# Altium PCB QCLogic Rev B.PcbDoc
Units mm, origin at the board's own origin, x right, y up, seen from the top; angles counter-clockwise.
Board outline 60 x 60 mm, 2 copper layers (Top Layer, Bottom Layer); 2 components, 0 nets, 311 pads, 0 vias.
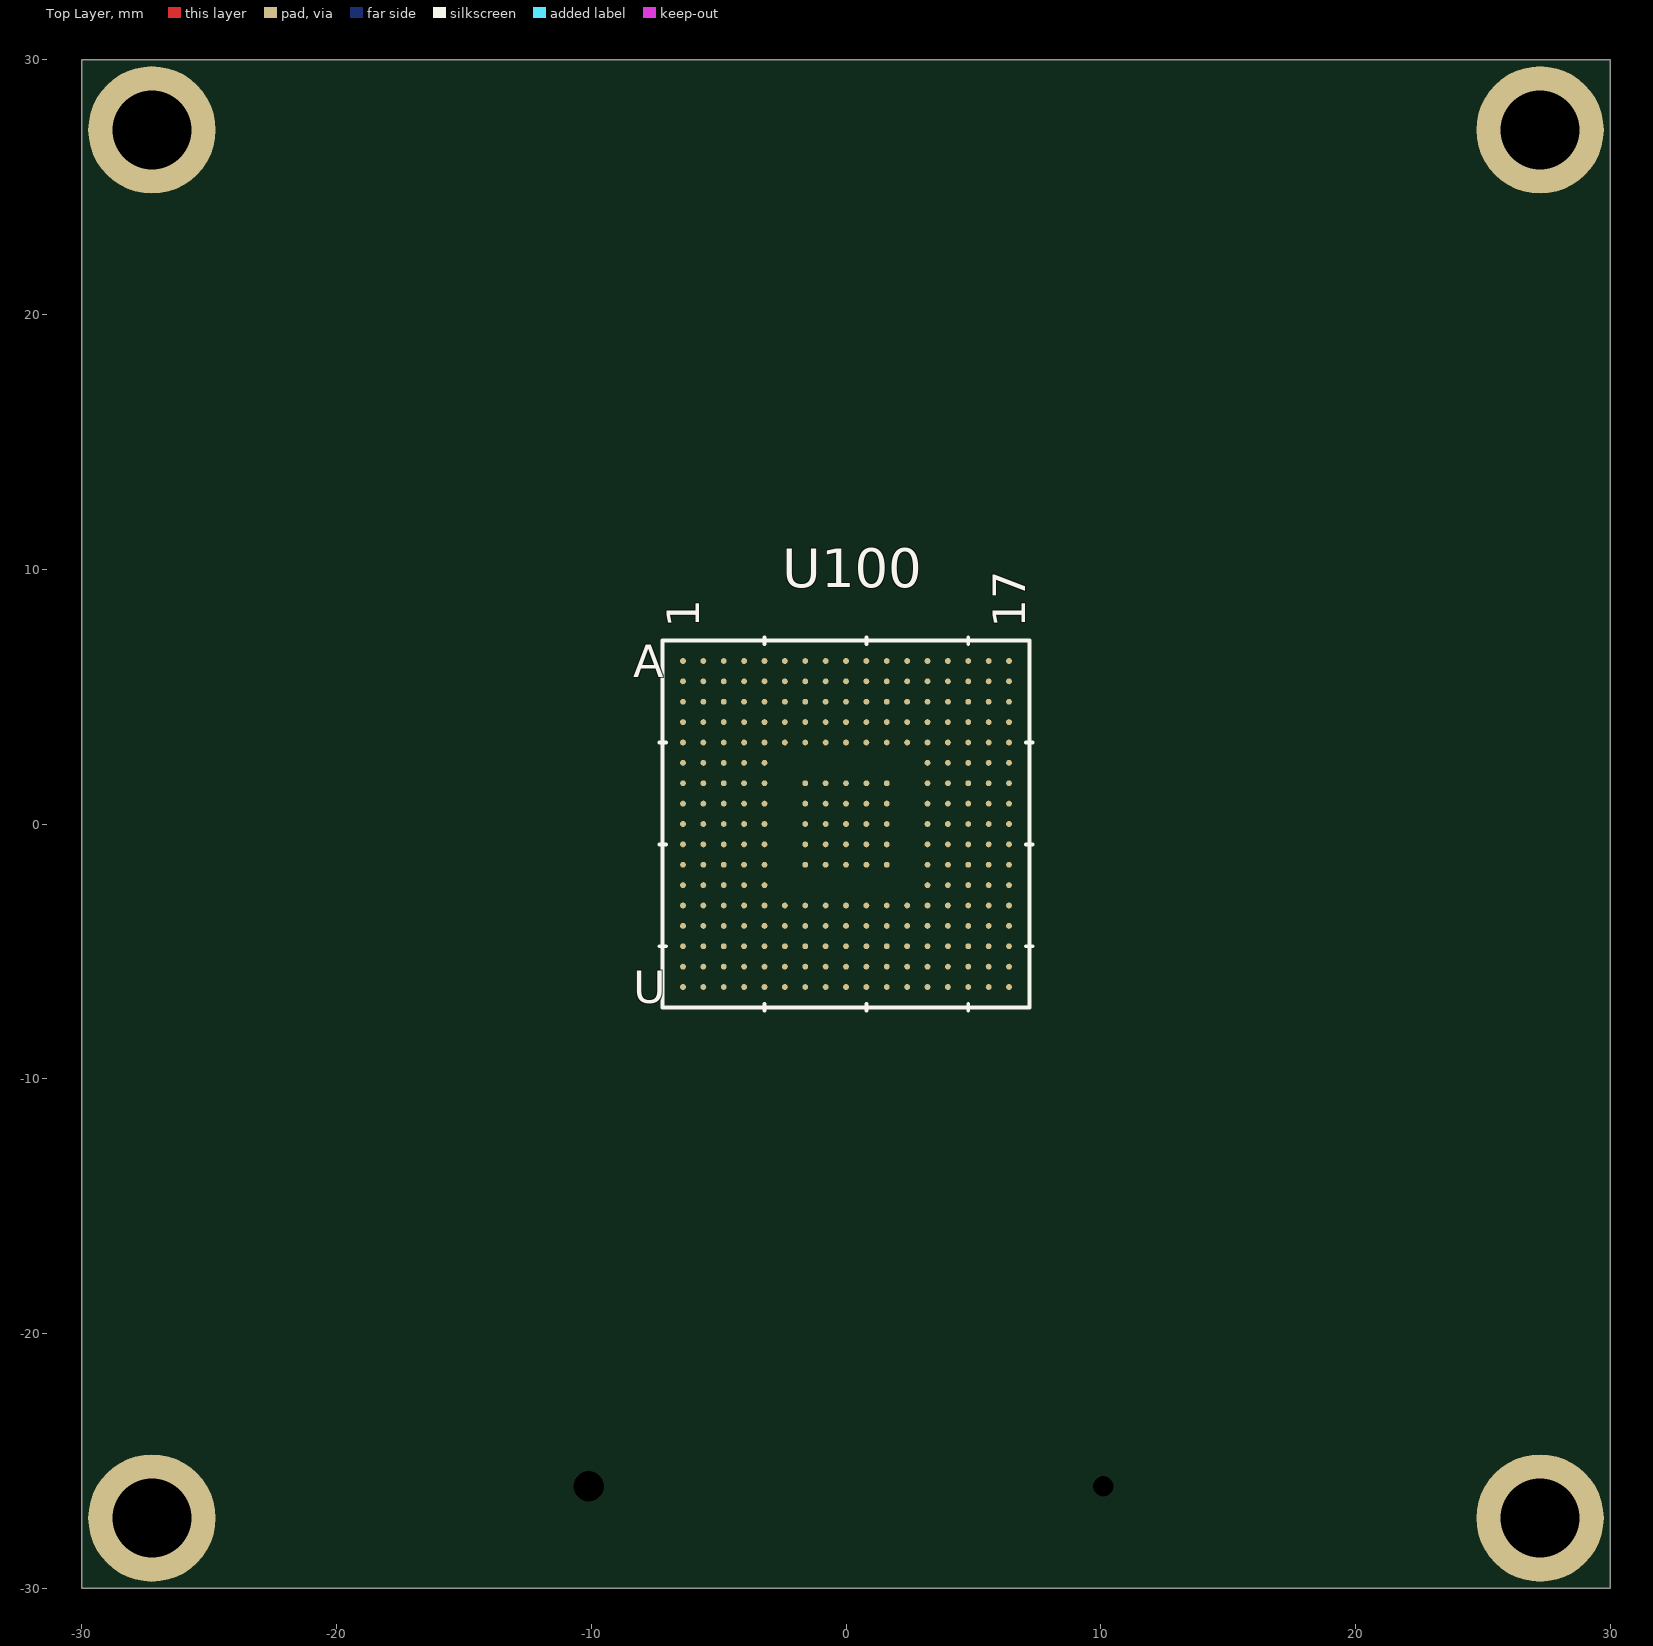
[diagram p0: Top Layer view]
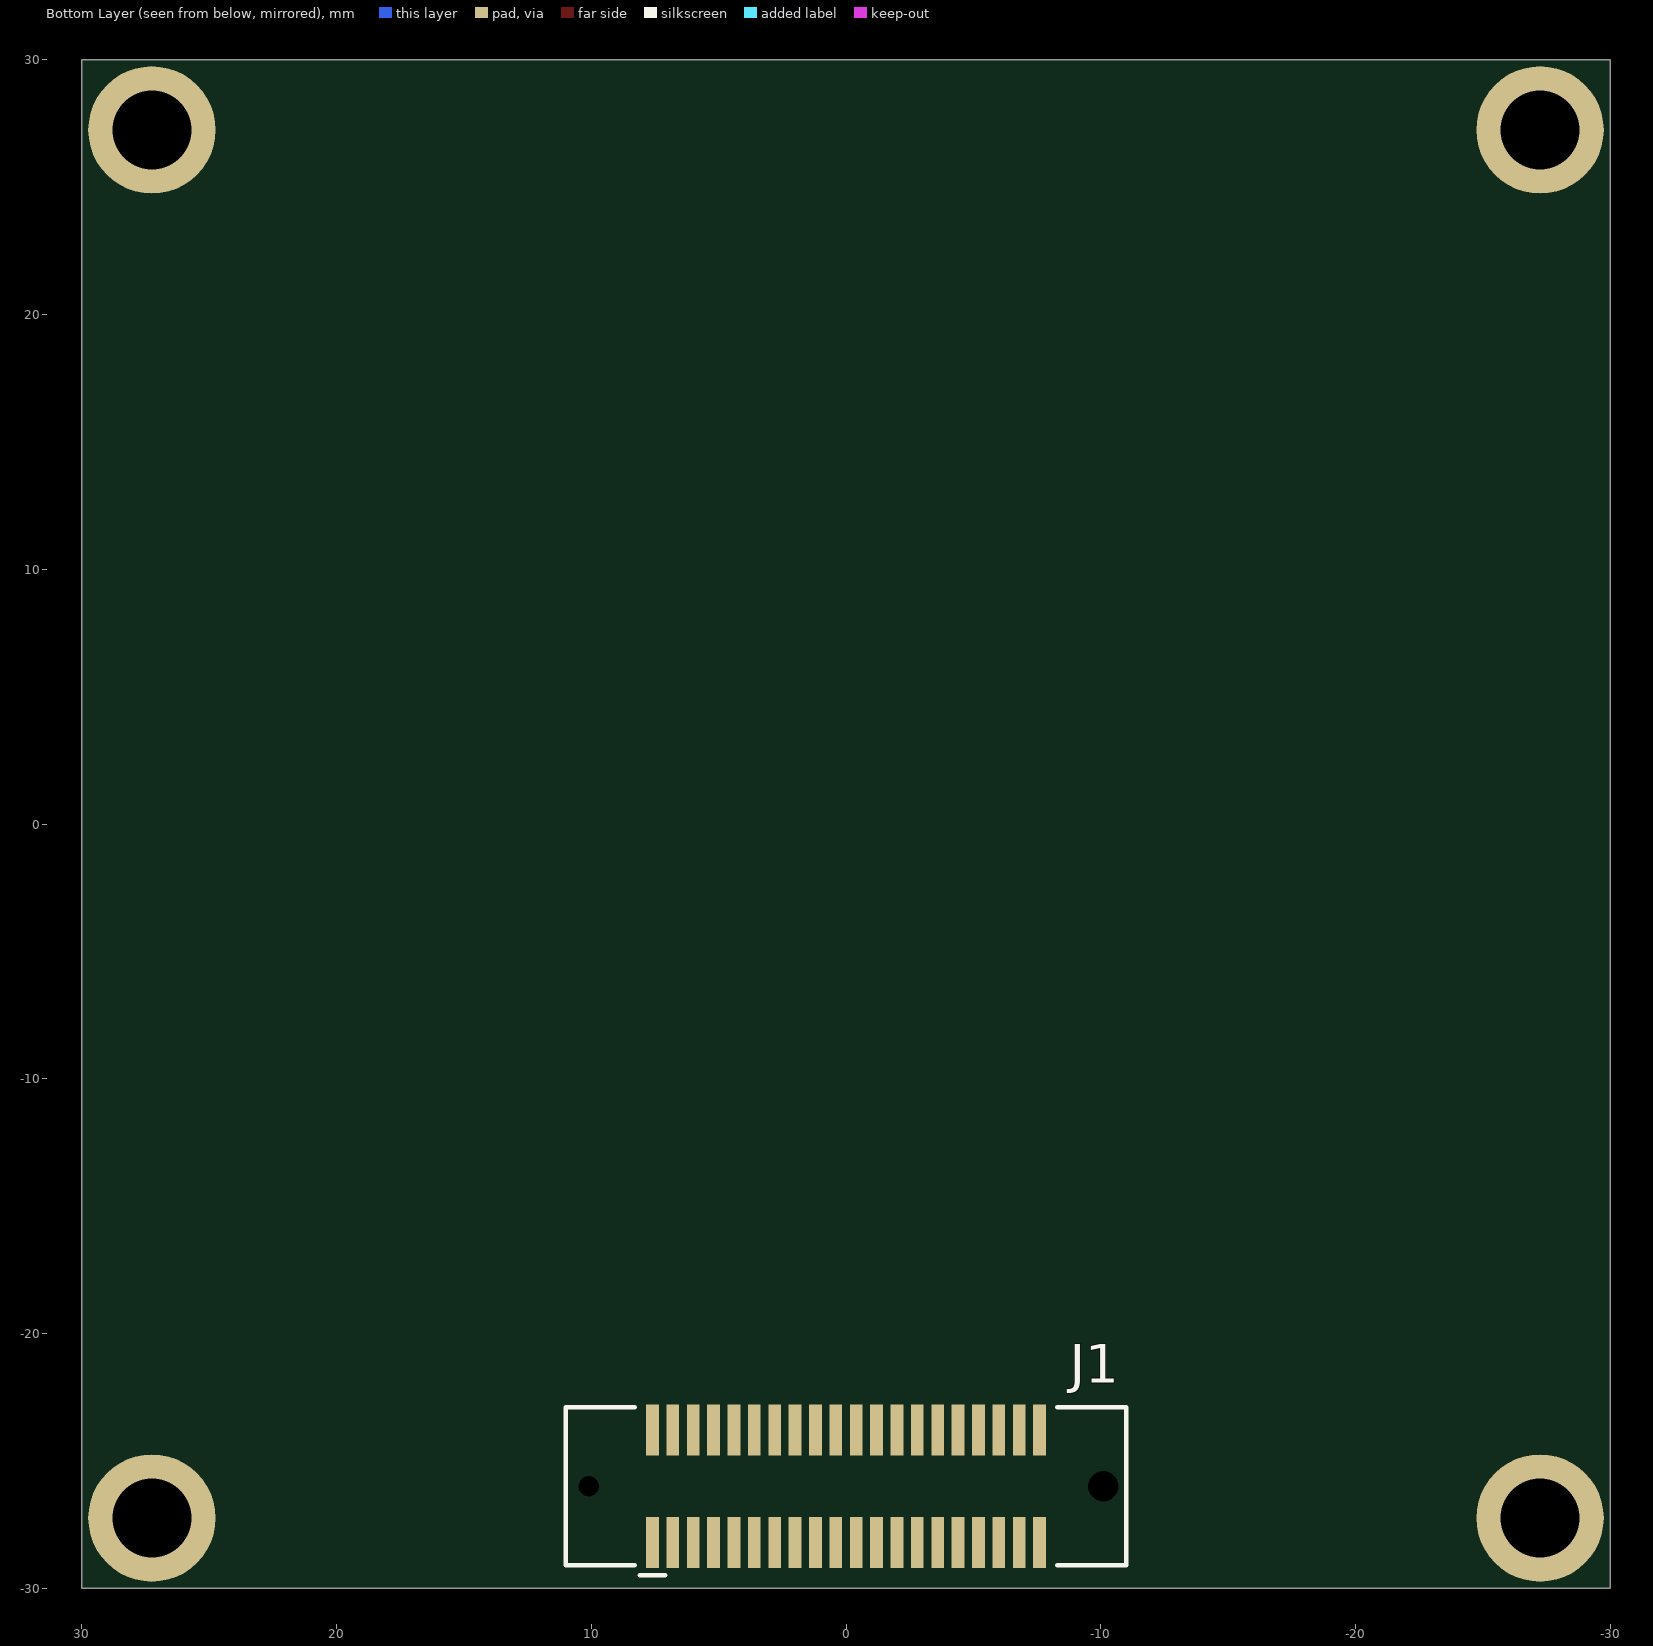
[diagram p1: Bottom Layer view, seen from below]

## Layer stack, top to bottom
Top Solder: solder mask 0.0102, Solder Resist, Dk 3.5
Top Layer: signal copper 0.0356
Dielectric 1: dielectric 0.32, FR-4, Dk 4.8
Bottom Layer: signal copper 0.0356
Bottom Solder: solder mask 0.0102, Solder Resist, Dk 3.5

## Board outline
-30,-30 30,-30 30,30 -30,30

## Design rules (kind name [scope] priority, off if disabled: settings)
Clearance [All] p1: gap=0.254 ignorepadtopadclearanceinfootprint=FALSE except(0: Arc-Hole Track-Hole SMDPad-Hole THPad-Hole Via-Hole Fill-Hole Poly-Hole Region-Hole Text-Hole)
PolygonConnect [All] p1: connectstyle=Relief reliefconductorwidth=0.254 reliefentries=4 polygonreliefangle="90 Angle" airgapwidth=0.254
RoutingVias [All] p1: holewidth=0.711 width=1.27 viastyle="Through Hole" minholewidth=0.711 minwidth=1.27 maxholewidth=0.711 maxwidth=1.27
SolderMaskExpansion [All] p1: expansion=0.102
Width [All] p1: maxlimit=0.254 minlimit=0.254 preferedwidth=0.254
30 further rules are at their usual default settings.

## Components (designator, comment, footprint, x,y, rotation, side; value= is the part's Value field where it differs from the comment)
J1 "B2B CONNECTOR" "CONN B2B RECPT 40POS SMD GOLD" 0,-26 r0 bottom
U100 "STM32H755XIH6" TFBGA240+25 0,0 r0 top

## Footprints (in the part's own frame and the unit in brackets; to place one, negate y for a bottom-side part, rotate by r counter-clockwise, add the part's x,y. Pads: shape width x height; smd on the part's side, far side on the other; paste and mask are expansions set on the pad)
"CONN B2B RECPT 40POS SMD GOLD" [mm] "10144517"
  rect 0.5x2 smd: 1(7.6,2.2) 2(7.6,-2.2) 3(6.8,2.2) 4(6.8,-2.2) 5(6,2.2) 6(6,-2.2) 7(5.2,2.2) 8(5.2,-2.2) 9(4.4,2.2) 10(4.4,-2.2) 11(3.6,2.2) 12(3.6,-2.2) 13(2.8,2.2) 14(2.8,-2.2) 15(2,2.2) 16(2,-2.2) 17(1.2,2.2) 18(1.2,-2.2) 19(0.4,2.2) 20(0.4,-2.2) 21(-0.4,2.2) 22(-0.4,-2.2) 23(-1.2,2.2) 24(-1.2,-2.2) 25(-2,2.2) 26(-2,-2.2) 27(-2.8,2.2) 28(-2.8,-2.2) 29(-3.6,2.2) 30(-3.6,-2.2) 31(-4.4,2.2) 32(-4.4,-2.2) 33(-5.2,2.2) 34(-5.2,-2.2) 35(-6,2.2) 36(-6,-2.2) 37(-6.8,2.2) 38(-6.8,-2.2) 39(-7.6,2.2) 40(-7.6,-2.2)
  round 0.5 hole 1.2 unplated: M1(-10.1,0)
  round 0.5 hole 0.8 unplated: M1(10.1,0)
  silkscreen extent -11,-3.1 11,3.5, body extent -10.9,-3 10.9,3, height 3.7
TFBGA240+25 [mil]
  round 9 smd paste+0.5 mask+3: A1(-251.97,251.97) A2(-220.47,251.97) A3(-188.98,251.97) A4(-157.48,251.97) A5(-125.98,251.97) A6(-94.49,251.97) A7(-62.99,251.97) A8(-31.5,251.97) A9(0,251.97) A10(31.5,251.97) A11(62.99,251.97) A12(94.49,251.97) A13(125.98,251.97) A14(157.48,251.97) A15(188.98,251.97) A16(220.47,251.97) A17(251.97,251.97) B1(-251.97,220.47) B2(-220.47,220.47) B3(-188.98,220.47) B4(-157.48,220.47) B5(-125.98,220.47) B6(-94.49,220.47) B7(-62.99,220.47) B8(-31.5,220.47) B9(0,220.47) B10(31.5,220.47) B11(62.99,220.47) B12(94.49,220.47) B13(125.98,220.47) B14(157.48,220.47) B15(188.98,220.47) B16(220.47,220.47) B17(251.97,220.47) C1(-251.97,188.98) C2(-220.47,188.98) C3(-188.98,188.98) C4(-157.48,188.98) C5(-125.98,188.98) C6(-94.49,188.98) C7(-62.99,188.98) C8(-31.5,188.98) C9(0,188.98) C10(31.5,188.98) C11(62.99,188.98) C12(94.49,188.98) C13(125.98,188.98) C14(157.48,188.98) C15(188.98,188.98) C16(220.47,188.98) C17(251.97,188.98) D1(-251.97,157.48) D2(-220.47,157.48) D3(-188.98,157.48) D4(-157.48,157.48) D5(-125.98,157.48) D6(-94.49,157.48) D7(-62.99,157.48) D8(-31.5,157.48) D9(0,157.48) D10(31.5,157.48) D11(62.99,157.48) D12(94.49,157.48) D13(125.98,157.48) D14(157.48,157.48) D15(188.98,157.48) D16(220.47,157.48) D17(251.97,157.48) E1(-251.97,125.98) E2(-220.47,125.98) E3(-188.98,125.98) E4(-157.48,125.98) E5(-125.98,125.98) E6(-94.49,125.98) E7(-62.99,125.98) E8(-31.5,125.98) E9(0,125.98) E10(31.5,125.98) E11(62.99,125.98) E12(94.49,125.98) E13(125.98,125.98) E14(157.48,125.98) E15(188.98,125.98) E16(220.47,125.98) E17(251.97,125.98) F1(-251.97,94.49) F2(-220.47,94.49) F3(-188.98,94.49) F4(-157.48,94.49) F5(-125.98,94.49) F13(125.98,94.49) F14(157.48,94.49) F15(188.98,94.49) F16(220.47,94.49) F17(251.97,94.49) G1(-251.97,62.99) G2(-220.47,62.99) G3(-188.98,62.99) G4(-157.48,62.99) G5(-125.98,62.99) G7(-62.99,62.99) G8(-31.5,62.99) G9(0,62.99) G10(31.5,62.99) G11(62.99,62.99) G13(125.98,62.99) G14(157.48,62.99) G15(188.98,62.99) G16(220.47,62.99) G17(251.97,62.99) H1(-251.97,31.5) H2(-220.47,31.5) H3(-188.98,31.5) H4(-157.48,31.5) H5(-125.98,31.5) H7(-62.99,31.5) H8(-31.5,31.5) H9(0,31.5) H10(31.5,31.5) H11(62.99,31.5) H13(125.98,31.5) H14(157.48,31.5) H15(188.98,31.5) H16(220.47,31.5) H17(251.97,31.5) J1(-251.97,0) J2(-220.47,0) J3(-188.98,0) J4(-157.48,0) J5(-125.98,0) J7(-62.99,0) J8(-31.5,0) J9(0,0) J10(31.5,0) J11(62.99,0) J13(125.98,0) J14(157.48,0) J15(188.98,0) J16(220.47,0) J17(251.97,0) K1(-251.97,-31.5) K2(-220.47,-31.5) K3(-188.98,-31.5) K4(-157.48,-31.5) K5(-125.98,-31.5) K7(-62.99,-31.5) K8(-31.5,-31.5) K9(0,-31.5) K10(31.5,-31.5) K11(62.99,-31.5) K13(125.98,-31.5) K14(157.48,-31.5) K15(188.98,-31.5) K16(220.47,-31.5) K17(251.97,-31.5) L1(-251.97,-62.99) L2(-220.47,-62.99) L3(-188.98,-62.99) L4(-157.48,-62.99) L5(-125.98,-62.99) L7(-62.99,-62.99) L8(-31.5,-62.99) L9(0,-62.99) L10(31.5,-62.99) L11(62.99,-62.99) L13(125.98,-62.99) L14(157.48,-62.99) L15(188.98,-62.99) L16(220.47,-62.99) L17(251.97,-62.99) M1(-251.97,-94.49) M2(-220.47,-94.49) M3(-188.98,-94.49) M4(-157.48,-94.49) M5(-125.98,-94.49) M13(125.98,-94.49) M14(157.48,-94.49) M15(188.98,-94.49) M16(220.47,-94.49) M17(251.97,-94.49) N1(-251.97,-125.98) N2(-220.47,-125.98) N3(-188.98,-125.98) N4(-157.48,-125.98) N5(-125.98,-125.98) N6(-94.49,-125.98) N7(-62.99,-125.98) N8(-31.5,-125.98) N9(0,-125.98) N10(31.5,-125.98) N11(62.99,-125.98) N12(94.49,-125.98) N13(125.98,-125.98) N14(157.48,-125.98) N15(188.98,-125.98) N16(220.47,-125.98) N17(251.97,-125.98) P1(-251.97,-157.48) P2(-220.47,-157.48) P3(-188.98,-157.48) P4(-157.48,-157.48) P5(-125.98,-157.48) P6(-94.49,-157.48) P7(-62.99,-157.48) P8(-31.5,-157.48) P9(0,-157.48) P10(31.5,-157.48) P11(62.99,-157.48) P12(94.49,-157.48) P13(125.98,-157.48) P14(157.48,-157.48) P15(188.98,-157.48) P16(220.47,-157.48) P17(251.97,-157.48) R1(-251.97,-188.98) R2(-220.47,-188.98) R3(-188.98,-188.98) R4(-157.48,-188.98) R5(-125.98,-188.98) R6(-94.49,-188.98) R7(-62.99,-188.98) R8(-31.5,-188.98) R9(0,-188.98) R10(31.5,-188.98) R11(62.99,-188.98) R12(94.49,-188.98) R13(125.98,-188.98) R14(157.48,-188.98) R15(188.98,-188.98) R16(220.47,-188.98) R17(251.97,-188.98) T1(-251.97,-220.47) T2(-220.47,-220.47) T3(-188.98,-220.47) T4(-157.48,-220.47) T5(-125.98,-220.47) T6(-94.49,-220.47) T7(-62.99,-220.47) T8(-31.5,-220.47) T9(0,-220.47) T10(31.5,-220.47) T11(62.99,-220.47) T12(94.49,-220.47) T13(125.98,-220.47) T14(157.48,-220.47) T15(188.98,-220.47) T16(220.47,-220.47) T17(251.97,-220.47) U1(-251.97,-251.97) U2(-220.47,-251.97) U3(-188.98,-251.97) U4(-157.48,-251.97) U5(-125.98,-251.97) U6(-94.49,-251.97) U7(-62.99,-251.97) U8(-31.5,-251.97) U9(0,-251.97) U10(31.5,-251.97) U11(62.99,-251.97) U12(94.49,-251.97) U13(125.98,-251.97) U14(157.48,-251.97) U15(188.98,-251.97) U16(220.47,-251.97) U17(251.97,-251.97)
  silkscreen extent -288,-288 288,288, body extent -278,-278 279,279, height 43

## Part data
J1: library part "CONN B2B RCPT 40POS SMD GOLD", "40 Position Connector Receptacle, Outer Shroud Contacts Surface Mount Gold", 1. Manufacturer="Amphenol ICC (FCI)", 2. Manufacturer Part Number=10144517-041802LF, 3. Date Modified=20201130
U100: library part "IC MCU 32BIT 2MB FLASH TFBGA", "IC MCU 32BIT 2MB FLASH TFBGA", 1. Manufacturer=STMicroelectronics, 2. Manufacturer Part Number=STM32H755XIH6, 3. Date Modified=20201206, 4. Footprint=TFBGA240+25

## Free pads (board coordinates)
  round 5 hole 3.1: S(-27.25,-27.25) S(-27.25,27.25) S(27.25,-27.25) S(27.25,27.25)

## Nets (pads, with @x,y where several pads share a name; then routed paths per layer and width w, separated by ;. In a path a pad name is that pad's centre, name@x,y a point inside that pad or via, vN(x,y) a via of type N, cw(c..) or ccw(c..) an arc to the next point about the centre after c; other vN are vias at no path point)
pads on no net: J1.1 J1.2 J1.3 J1.4 J1.5 J1.6 J1.7 J1.8 J1.9 J1.10 J1.11 J1.12 J1.13 J1.14 J1.15 J1.16 J1.17 J1.18 J1.19 J1.20 J1.21 J1.22 J1.23 J1.24 J1.25 J1.26 J1.27 J1.28 J1.29 J1.30 J1.31 J1.32 J1.33 J1.34 J1.35 J1.36 J1.37 J1.38 J1.39 J1.40 J1.M1 U100.A1 U100.A2 U100.A3 U100.A4 U100.A5 U100.A6 U100.A7 U100.A8 U100.A9 U100.A10 U100.A11 U100.A12 U100.A13 U100.A14 U100.A15 U100.A16 U100.A17 U100.B1 U100.B2 U100.B3 U100.B4 U100.B5 U100.B6 U100.B7 U100.B8 U100.B9 U100.B10 U100.B11 U100.B12 U100.B13 U100.B14 U100.B15 U100.B16 U100.B17 U100.C1 U100.C2 U100.C3 U100.C4 U100.C5 U100.C6 U100.C7 U100.C8 U100.C9 U100.C10 U100.C11 U100.C12 U100.C13 U100.C14 U100.C15 U100.C16 U100.C17 U100.D1 U100.D2 U100.D3 U100.D4 U100.D5 U100.D6 U100.D7 U100.D8 U100.D9 U100.D10 U100.D11 U100.D12 U100.D13 U100.D14 U100.D15 U100.D16 U100.D17 U100.E1 U100.E2 U100.E3 U100.E4 U100.E5 U100.E6 U100.E7 U100.E8 U100.E9 U100.E10 U100.E11 U100.E12 U100.E13 U100.E14 U100.E15 U100.E16 U100.E17 U100.F1 U100.F2 U100.F3 U100.F4 U100.F5 U100.F13 U100.F14 U100.F15 U100.F16 U100.F17 U100.G1 U100.G2 U100.G3 U100.G4 U100.G5 U100.G7 U100.G8 U100.G9 U100.G10 U100.G11 U100.G13 U100.G14 U100.G15 U100.G16 U100.G17 U100.H1 U100.H2 U100.H3 U100.H4 U100.H5 U100.H7 U100.H8 U100.H9 U100.H10 U100.H11 U100.H13 U100.H14 U100.H15 U100.H16 U100.H17 U100.J1 U100.J2 U100.J3 U100.J4 U100.J5 U100.J7 U100.J8 U100.J9 U100.J10 U100.J11 U100.J13 U100.J14 U100.J15 U100.J16 U100.J17 U100.K1 U100.K2 U100.K3 U100.K4 U100.K5 U100.K7 U100.K8 U100.K9 U100.K10 U100.K11 U100.K13 U100.K14 U100.K15 U100.K16 U100.K17 U100.L1 U100.L2 U100.L3 U100.L4 U100.L5 U100.L7 U100.L8 U100.L9 U100.L10 U100.L11 U100.L13 U100.L14 U100.L15 U100.L16 U100.L17 U100.M1 U100.M2 U100.M3 U100.M4 U100.M5 U100.M13 U100.M14 U100.M15 U100.M16 U100.M17 U100.N1 U100.N2 U100.N3 U100.N4 U100.N5 U100.N6 U100.N7 U100.N8 U100.N9 U100.N10 U100.N11 U100.N12 U100.N13 U100.N14 U100.N15 U100.N16 U100.N17 U100.P1 U100.P2 U100.P3 U100.P4 U100.P5 U100.P6 U100.P7 U100.P8 U100.P9 U100.P10 U100.P11 U100.P12 U100.P13 U100.P14 U100.P15 U100.P16 U100.P17 U100.R1 U100.R2 U100.R3 U100.R4 U100.R5 U100.R6 U100.R7 U100.R8 U100.R9 U100.R10 U100.R11 U100.R12 U100.R13 U100.R14 U100.R15 U100.R16 U100.R17 U100.T1 U100.T2 U100.T3 U100.T4 U100.T5 U100.T6 U100.T7 U100.T8 U100.T9 U100.T10 U100.T11 U100.T12 U100.T13 U100.T14 U100.T15 U100.T16 U100.T17 U100.U1 U100.U2 U100.U3 U100.U4 U100.U5 U100.U6 U100.U7 U100.U8 U100.U9 U100.U10 U100.U11 U100.U12 U100.U13 U100.U14 U100.U15 U100.U16 U100.U17

## Silkscreen, mask and mechanical layers (free items; w line width, h text height)
Mechanical 1:
  the board outline again, w0.25

## Text inside footprints (layer, text, board x,y; h text height)
U100: Top Overlay "17" at 7.035,7.709 h1.27 r90; Top Overlay "1" at -5.765,7.709 h1.27 r90; Top Overlay "U" at -8.344,-7.035 h1.27; Top Overlay "A" at -8.344,5.765 h1.27; Mechanical 3 "U" at -8.344,-7.035 h1.27; Mechanical 3 "A" at -8.344,5.765 h1.27; Mechanical 3 "1" at -5.765,7.709 h1.27 r90; Mechanical 3 "17" at 7.035,7.709 h1.27 r90